# Altium PCB ADC_Comm.PcbDoc
Units mm, origin at the board's own origin, x right, y up, seen from the top; angles counter-clockwise.
Board outline 80 x 48 mm, 4 copper layers (Top Layer 1, Top Layer, Bottom Layer, Bottom Layer 1), stack 0.551 mm thick; 52 components, 24 nets, 189 pads, 0 vias.
Unrouted connection lines stored in the file: 96.
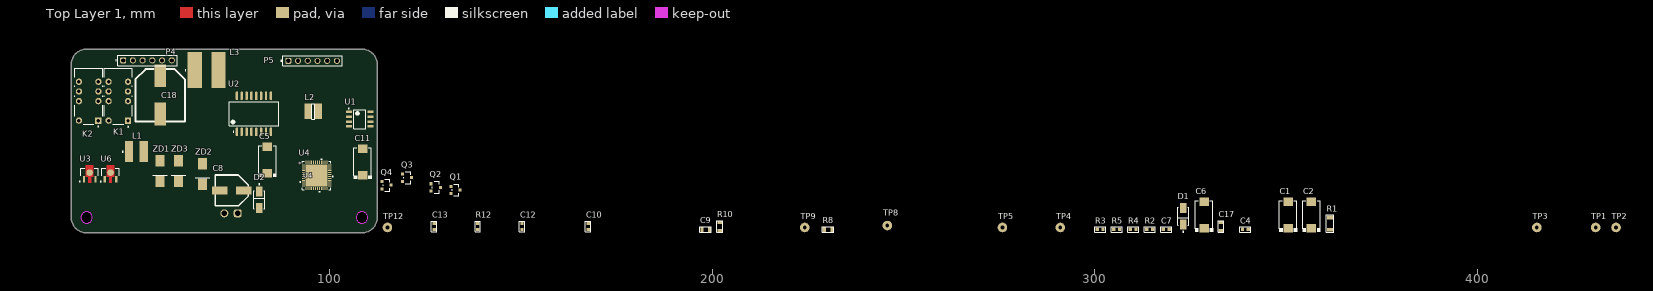
[diagram p0: Top Layer 1 view]
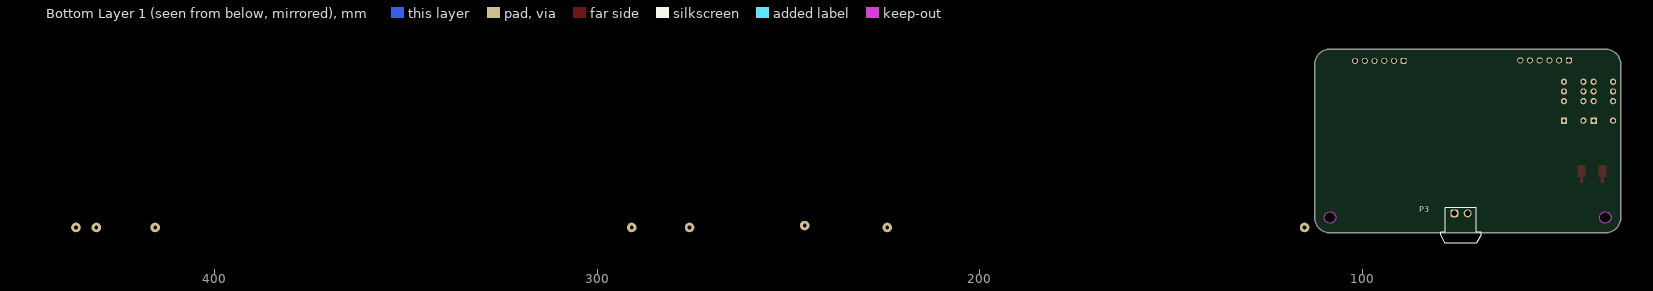
[diagram p1: Bottom Layer 1 view, seen from below]
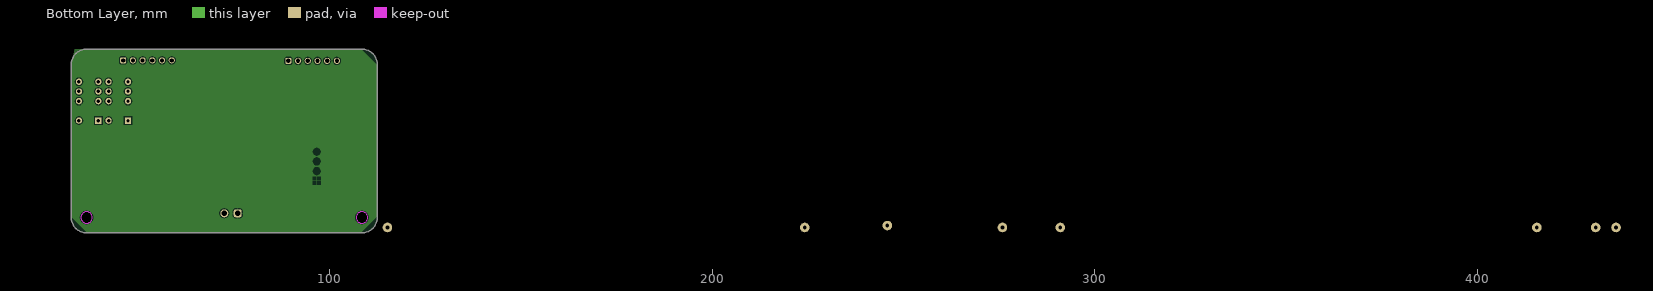
[diagram p2: Bottom Layer]

## Layer stack, top to bottom
Top Solder: solder mask 0.0254, SM-001, Dk 4
Top Layer 1: signal copper 0.009
Dielectric 2: prepreg 0.0711, PP-006, Dk 4.1
Top Layer: signal copper 0.0356
Dielectric 1: dielectric 0.32, FR-4, Dk 4.8
Bottom Layer: signal copper 0.0356
Dielectric 3: prepreg 0.0711, PP-006, Dk 4.1
Bottom Layer 1: signal copper 0.009
Bottom Solder: solder mask 0.0254, SM-001, Dk 4

## Board outline
32.406,33.978 ccw(c36.405,33.978) 36.405,29.978 108.406,29.978 ccw(c108.406,33.978) 112.406,33.978 112.406,73.978 ccw(c108.406,73.978) 108.406,77.978 36.405,77.978 ccw(c36.405,73.978) 32.406,73.978
cut-out: 106.906,33.978 ccw(c108.406,33.978) 108.406,32.478 ccw(c108.406,33.978) 109.906,33.978 ccw(c108.406,33.978) 108.406,35.478 ccw(c108.406,33.978)
cut-out: 34.906,33.978 ccw(c36.405,33.978) 36.405,32.478 ccw(c36.405,33.978) 37.905,33.978 ccw(c36.405,33.978) 36.405,35.478 ccw(c36.405,33.978)

## Design rules (kind name [scope] priority, off if disabled: settings)
Clearance [All] p1: gap=0.154 ignorepadtopadclearanceinfootprint=FALSE
PolygonConnect [All] p1: connectstyle=Relief reliefconductorwidth=0.254 reliefentries=4 polygonreliefangle="90 Angle" airgapwidth=0.254
RoutingVias [All] p1: holewidth=0.711 width=1.27 viastyle="Through Hole" minholewidth=0.711 minwidth=1.27 maxholewidth=0.711 maxwidth=1.27
SolderMaskExpansion [All] p1: expansion=0.102 istentingtop=FALSE
SupplyNets "Schematic Supply Nets_7" [InNet('GND_ISOL')] p1: voltage=0.000
SupplyNets "Schematic Supply Nets_8" [InNet('+12')] p2: voltage=0.000
SupplyNets "Schematic Supply Nets_6" [InNet('+5V')] p3: voltage=0.000
SupplyNets "Schematic Supply Nets_4" [InNet('GND')] p4: voltage=0.000
SupplyNets "Schematic Supply Nets_3" [InNet('VCC')] p5: voltage=0.000
SupplyNets "Schematic Supply Nets_2" [InNet('3v3')] p6: voltage=0.000
Width [All] p1: maxlimit=0.254 minlimit=0.254 preferedwidth=0.254
30 further rules are at their usual default settings.

## Components (designator, comment, footprint, x,y, rotation, side; value= is the part's Value field where it differs from the comment)
C1 "100uF_16V" CAP-TAN-D 350.52,34.671 r90 top
C2 "100uF_16V" CAP-TAN-D 356.616,34.671 r90 top
C4 "470pF" CAP-0603 339.344,30.861 r0 top
C5 "100uF_16V" CAP-TAN-D 83.693,49.022 r90 top
C6 "100uF_16V" CAP-TAN-D 328.549,34.671 r90 top
C7 "0.1uF" CAP-0603 318.643,30.861 r0 top
C8 "330uF 25V" CAP_SMD_Size_E 74.295,41.021 r0 top
C9 "0.47uF" CAP-0805 198.247,30.861 r0 top
C10 "0.1uF" CAP-0603 167.513,31.623 r90 top
C11 "47uF_16V" CAP-TAN-D 108.585,48.514 r90 top
C12 "0.1uF" CAP-0603 150.241,31.623 r90 top
C13 "0.1uF" CAP-0603 127.254,31.623 r90 top
C17 "0.47uF" CAP-0805 332.994,31.623 r90 top
C18 "CAP_POL_SMD" CAP_SMD_SIZE_H 55.626,66.04 r90 top
D1 "ES1G" FP-403AE-MFG 323.088,34.29 r90 top
D2 "SS14" DO-214-AC 81.534,38.608 r90 top
K1 "F1CA005V" V23079-A1001-B301 44.704,65.659 r90 top
K2 "F1CA005V" V23079-A1001-B301 36.957,65.659 r90 top
L1 "470µH" WE-PD2_5848 49.423,51.181 r0 top
L2 "220uH" Coil_4.5x4.5_mm 95.631,61.722 r0 top
L3 "27µH, 1.95A" WE-PD2_1054 67.768,72.517 r0 top
P3 "691305140002" 691305140002 74.168,31.877 r180 bottom
P4 "61300611121" 61300611121 52.324,75.057 r0 top
P5 "61300611121" 61300611121 95.504,74.93 r0 top
Q1 "AO3400A" FP-SOT23-MFG 132.842,41.148 r0 top
Q2 "AO3400A" FP-SOT23-MFG 127.692,41.844 r0 top
Q3 "AO3400A" FP-SOT23-MFG 120.199,44.384 r0 top
Q4 "AO3400A" FP-SOT23-MFG 114.808,42.418 r0 top
R1 "0.33" RES-1206 361.442,32.385 r90 top
R2 "10K" RES-0603 314.325,30.861 r0 top
R3 "10K" RES-0603 301.371,30.861 r0 top
R4 "10K" RES-0603 310.007,30.861 r0 top
R5 "10K" RES-0603 305.689,30.861 r0 top
R8 "6.8K" RES-0805 230.251,30.861 r0 top
R10 "1.2K" RES-0805 201.93,31.623 r90 top
R12 "10K" RES-0603 138.684,31.623 r90 top
TP1 "Test_Point_PCB" Test_Point 430.911,31.369 r0 top
TP2 "Test_Point_PCB" Test_Point 436.245,31.369 r0 top
TP3 "Test_Point_PCB" Test_Point 415.544,31.369 r0 top
TP4 "Test_Point_PCB" Test_Point 290.957,31.369 r0 top
TP5 "Test_Point_PCB" Test_Point 275.844,31.369 r0 top
TP8 "Test_Point_PCB" Pin_Test_Point(Orange) 245.745,31.877 r0 top
TP9 "Test_Point_PCB" Test_Point 224.155,31.369 r0 top
TP12 "Test_Point_PCB" Test_Point 115.062,31.369 r90 top
U1 "MC34063" SOIC-8_M 107.823,59.69 r0 top
U2 "ADM2687E" ADI-RI-16-2_M 80.137,61.088 r90 top
U3 "AMS1117" SOT-89 37.211,45.72 r0 top
U4 "STM32L452CCU6" UFQFPN48-7x7mm_STM 96.52,44.958 r0 top
U6 "AMS1117-3.3" SOT-89 42.672,45.72 r0 top
ZD1 "P6SMB16CA" DO-214AA 55.626,43.815 r90 top
ZD2 "P6SMB16CA" DO-214AA 66.675,43.053 r90 top
ZD3 "P6SMB16CA" DO-214AA 60.452,43.815 r90 top

## Footprints (in the part's own frame and the unit in brackets; to place one, negate y for a bottom-side part, rotate by r counter-clockwise, add the part's x,y. Pads: shape width x height; smd on the part's side, far side on the other; paste and mask are expansions set on the pad)
61300611121 [mm] "Pin Header, pitch 2.54 mm, THT, Vertical, single row, 6p"
  rrect50% 1.6x1.6 hole 1.1: 1(-6.35,0)
  round 1.6 hole 1.1: 2(-3.81,0) 3(-1.27,0) 4(1.27,0) 5(3.81,0) 6(6.35,0)
  silkscreen extent -8.34,-1.35 7.77,1.35, body extent -7.62,-1.27 7.62,1.27, height 8.57
691305140002 [mm] "Horizontal PCB Header with Plastic Latch, pitch 3.5mm, 02p"
  rrect50% 2.1x2.1 hole 1.4: 1(-1.75,3.2)
  round 2.1 hole 1.4: 2(1.75,3.2)
  silkscreen extent -5.25,-4.6 5.25,4.6, body extent -5.25,-4.6 5.25,4.6, height 7.25
ADI-RI-16-2_M [mm] "ADI-RI-16-2_M"
  oval 2.3x0.65 smd: 1(-4.7,4.445) 2(-4.7,3.175) 3(-4.7,1.905) 4(-4.7,0.635) 5(-4.7,-0.635) 6(-4.7,-1.905) 7(-4.7,-3.175) 8(-4.7,-4.445) 9(4.7,-4.445) 10(4.7,-3.175) 11(4.7,-1.905) 12(4.7,-0.635) 13(4.7,0.635) 14(4.7,1.905) 15(4.7,3.175) 16(4.7,4.445)
  silkscreen extent -4.82,-6.45 3.15,6.45, body extent -3.8,-6.45 3.8,6.45, height 2.64
CAP-0603 [mm]
  rect 0.85x0.9 smd: 1(-0.775,0) 2(0.775,0)
  silkscreen extent -1.43,-0.67 1.43,0.67, body extent -0.8,-0.4 0.8,0.4, height 0.8
CAP-0805 [mm]
  rect 0.8x1.25 smd mask+0.015: 1(-1,0) 2(1,0)
  silkscreen extent -1.52,-0.76 1.52,0.76, body extent -1,-0.62 1,0.63, height 0.8
CAP-TAN-D [mm]
  rect 2.2x2.5 smd: 1(-3.45,0) 2(3.45,0)
  silkscreen extent -4.5,-2.4 3.65,2.4, body extent -3.8,-2.3 3.8,2.3, height 4
CAP_SMD_Size_E [mm]
  rect 4x2 smd: 1(3.175,0) 2(-3.048,0)
  silkscreen extent -4.19,-3.94 4.32,4.06, body extent -4.25,-4 4.25,4, height 10.59
CAP_SMD_SIZE_H [mm]
  rect 6x3 smd: 1(5,0) 2(-5,0)
  silkscreen extent -6.98,-6.48 6.73,6.48, body extent -7,-6.44 7,6.44, height 13.62
Coil_4.5x4.5_mm [mm]
  rect 1.8x4 smd: 1(-1.397,0) 2(1.397,0)
  silkscreen extent -0.38,-2.03 0.38,2.03, body extent -2.07,-2.07 2.07,2.07, height 2.8
DO-214-AC [mm]
  rect 2.65x1.75 smd paste+0 mask+0: 1(-2.15,0) 2(2.15,0)
  silkscreen extent -2.37,-1.48 4.17,1.48, body extent -3.57,-1.58 3.57,1.58, height 0.25
DO-214AA [mm]
  rect 3x2.4 smd: 1(-0.381,0) 2(4.953,0)
  silkscreen extent 1.27,-1.91 1.27,1.91, body extent -0.53,-1.85 5.07,2.1, height 2.65
FP-403AE-MFG [mm]
  rect 2.65x1.75 smd paste+0 mask+0: 1(-2.15,0) 2(2.15,0)
  silkscreen extent -4.17,-1.48 2.37,1.48, body extent -3.57,-1.58 3.57,1.58, height 0.25
FP-SOT23-MFG [mm]
  rect 0.8x0.8 smd paste+0 mask+0: 1(-1.2,0.95) 2(-1.2,-0.95) 3(1.2,0)
  silkscreen extent -0.9,-1.55 0.9,1.55, body extent -1.7,-1.78 1.7,1.78, height 0.25
Pin_Test_Point(Orange) [mm]
  round 2.5 hole 0.95: 1(0,0)
  body extent -1.3,-1.78 1.3,1.78, height 6.93
RES-0603 [mm]
  rect 0.85x0.9 smd: 1(-0.775,0) 2(0.775,0)
  silkscreen extent -1.43,-0.67 1.43,0.67, body extent -0.85,-0.45 0.85,0.45, height 0.55
RES-0805 [mm]
  rect 0.8x1.25 smd mask+0.015: 1(-1,0) 2(1,0)
  silkscreen extent -1.52,-0.76 1.52,0.76, body extent -1,-0.62 1,0.63, height 0.6
RES-1206 [mm]
  rect 1x1.6 smd: 1(-1.6,0) 2(1.6,0)
  silkscreen extent -2.29,-1.02 2.29,1.02, body extent -1.6,-0.8 1.6,0.8, height 0.6
SOIC-8_M [mm]
  rrect15% 1.65x0.65 smd: 1(-2.825,1.905) 2(-2.825,0.635) 3(-2.825,-0.635) 4(-2.825,-1.905) 5(2.825,-1.905) 6(2.825,-0.635) 7(2.825,0.635) 8(2.825,1.905)
  silkscreen extent -2.95,-2.5 1.6,2.9, body extent -3,-2.45 3,2.45, height 1.63
SOT-89 [mm]
  rect 0.58x1.73 smd paste+0 mask+0: 1(-1.5,-1.781) 3(1.5,-1.781)
  round 1.74 smd paste+0 mask+0: 2(0,0)
  Top Layer 1 region: -0.38,-2.646 -0.38,-1.146 -0.967,-1.146 -0.967,1.884 0.967,1.884 0.967,-1.146 0.38,-1.146 0.38,-2.646
  silkscreen extent -2.7,-2.47 2.3,1.15, body extent -2.4,-2.75 2.4,1.98, height 0.25
Test_Point [mm]
  round 2.5 hole 0.95: 1(0,0)
UFQFPN48-7x7mm_STM [mm] "UFQFPN48-7x7mm_STM"
  rect 0.808x0.255 smd paste+0 mask+0: 1(-3.452,2.75) 2(-3.452,2.25) 3(-3.452,1.75) 4(-3.452,1.25) 5(-3.452,0.75) 6(-3.452,0.25) 7(-3.452,-0.25) 8(-3.452,-0.75) 9(-3.452,-1.25) 10(-3.452,-1.75) 11(-3.452,-2.25) 12(-3.452,-2.75) 25(3.452,-2.75) 26(3.452,-2.25) 27(3.452,-1.75) 28(3.452,-1.25) 29(3.452,-0.75) 30(3.452,-0.25) 31(3.452,0.25) 32(3.452,0.75) 33(3.452,1.25) 34(3.452,1.75) 35(3.452,2.25) 36(3.452,2.75)
  rect 0.255x0.808 smd paste+0 mask+0: 13(-2.75,-3.452) 14(-2.25,-3.452) 15(-1.75,-3.452) 16(-1.25,-3.452) 17(-0.75,-3.452) 18(-0.25,-3.452) 19(0.25,-3.452) 20(0.75,-3.452) 21(1.25,-3.452) 22(1.75,-3.452) 23(2.25,-3.452) 24(2.75,-3.452) 37(2.75,3.452) 38(2.25,3.452) 39(1.75,3.452) 40(1.25,3.452) 41(0.75,3.452) 42(0.25,3.452) 43(-0.25,3.452) 44(-0.75,3.452) 45(-1.25,3.452) 46(-1.75,3.452) 47(-2.25,3.452) 48(-2.75,3.452)
  rect 5.69x5.69 smd paste-2.845 mask+0: 49(0,0)
  silkscreen extent -4.36,-4.36 4.36,4.36, body extent -3.56,-3.56 3.56,3.56, height 0.61
V23079-A1001-B301 [mm]
  rect 1.65x1.65 hole 0.9 paste-2539.97 mask+0: 1(-6.35,-2.54)
  round 1.65 hole 0.9 paste-2539.97 mask+0: 2(-1.27,-2.54) 3(1.27,-2.54) 4(3.81,-2.54) 5(3.81,2.54) 6(1.27,2.54) 7(-1.27,2.54) 8(-6.35,2.54)
  silkscreen extent -8.02,-3.65 7.3,3.65, body extent -7.4,-3.75 7.4,3.75, height 0.25
WE-PD2_1054 [mm] "SMD Power Inductor, 2-Leads, body 10x9mm"
  rect 3.75x9.5 smd: 1(-3.125,0) 2(3.125,0)
  silkscreen extent -5.62,-0.12 -5.37,0.12, body extent -5.04,-4.5 5.04,4.5, height 5.43
WE-PD2_5848 [mm] "SMD Power Inductor, 2-Leads, body 5.8x5.2mm"
  rect 2.15x5.5 smd: 1(-1.925,0) 2(1.925,0)
  silkscreen extent -3.67,-0.12 -3.42,0.12, body extent -2.9,-2.6 2.89,2.6, height 4.48

## Part data
C1 C2 C5 C6 C8: library part CAP_POL_SMD
C4 C7 C9 C10 C12 C13 C17: library part CAP-NON-POLAR
C11: library part CAP-POLAR
D1: "Ultrafast"
L1: library part 744774033, "WE-PD2 SMT Power Inductor, size 5848, 3.3µH, 4A, 0.06Ω", Case/Size Code=5848, DC Resistance=0.042Ω, DC Resistance Max=0.06Ω, Inductance=3.3µH, Manufacturer="Wurth Elektronik", Operating Temperature Max=125°C, Operating Temperature Min=-40°C, Rated Current=4A, Saturation Current=7.5A, Self Resonant Frequency=43MHz, Category="Unshielded Power Inductors", ComponentLink1Description="Website Link", ComponentLink1URL=https://www.we-online.com/redexpert/article/744774033?ad, ComponentLink2Description="Datasheet Link", ComponentLink2URL=https://www.we-online.com/redexpert/spec/744774033?ad, Height=4.5mm, Length=5.8mm, Manufacturer Part Number=744774033, Match Code=WE-PD2, Mount="Surface Mount", Packaging="Tape and Reel", Width=5.2mm, Simulation ModelName=5848_744774033_3.3u, Simulation ModelText=".subckt 5848_744774033_3.3u 1 2 / Rp 1 2 12000 / Cp 1 2 3.4p / Rs 1 N3 0.042 / L1 N3 2 3.3u / .ends 5848_744774033_3.3u", Simulation PortMap=(1:1),(2:2)
L2: library part Coil
L3: library part 744776127, "WE-PD2 SMT Power Inductor, size 1054, 27µH, 1.95A, 0.11Ω", Case/Size Code=1054, DC Resistance=0.063Ω, DC Resistance Max=0.11Ω, Inductance=27µH, Manufacturer="Wurth Elektronik", Operating Temperature Max=125°C, Operating Temperature Min=-40°C, Rated Current=1.95A, Saturation Current=1.98A, Self Resonant Frequency=15MHz, Category="Unshielded Power Inductors", ComponentLink1Description="Website Link", ComponentLink1URL=https://www.we-online.com/redexpert/article/744776127?ad, ComponentLink2Description="Datasheet Link", ComponentLink2URL=https://www.we-online.com/redexpert/spec/744776127?ad, Height=5.4mm, Length=10mm, Manufacturer Part Number=744776127, Match Code=WE-PD2, Mount="Surface Mount", Packaging="Tape and Reel", Width=9mm, Simulation ModelName=1054_744776127_27u, Simulation ModelText=".subckt 1054_744776127_27u 1 2 / Rp 1 2 22000 / Cp 1 2 4.7p / Rs 1 N3 0.0627 / L1 N3 2 27u / .ends 1054_744776127_27u", Simulation PortMap=(1:1),(2:2)
P3: "WR-TBL Series 3051 Horizontal PCB Header, THT, pitch 3.5mm, 02p", Manufacturer="Wurth Elektronik", Operating Temperature Max=105degC, Operating Temperature Min=-40degC, Rated Current=12A, Working Voltage=300V, Application=Pluggable, Category="Terminal Block", ComponentLink1Description="Website Link", ComponentLink1URL=https://www.we-online.com, ComponentLink2Description="Datasheet Link", ComponentLink2URL=https://www.we-online.com/components/products/datasheet/691305140002, Lead Pitch=3.5mm, Manufacturer Part Number=691305140002, Modularity=No, Mount="Through Hole", Number of Pins=2, Number of Rows=1, Orientation=Horizontal, Packaging=Box, System="Pluggable Connector"
P4 P5: "WR-PHD Pin Header, THT, Vertical, pitch 2.54mm, 1 Row, 6P", Contact Resistance=20mOhm, Manufacturer="Wurth Elektronik", Operating Temperature Max=105°C, Operating Temperature Min=-40°C, Rated Current=3A, Withstanding Voltage=500V, Working Voltage=250V, Category="Board-to-Board Connectors", ComponentLink1Description="Website Link", ComponentLink1URL=https://www.we-online.com/redexpert/article/61300611121?ad, ComponentLink2Description="Datasheet Link", ComponentLink2URL=https://www.we-online.com/redexpert/spec/61300611121?ad, Gender="Pin Header", Manufacturer Part Number=61300611121, Match Code=WR-PHD, Mount="Through Hole", Number of Pins=6, Number of Rows=1, Orientation=Vertical, Packaging=Bag, Pitch=2.54mm
Q1 Q2 Q3 Q4: library part CMP-83955-000006-1, "MOSFET N-CH 30V 5.7A SOT23", Case/Package=SOT-23, Continuous Drain Current (ID)=5.7A, Drain to Source Voltage (Vdss)=30V, Gate to Source Voltage (Vgs)=12V, Input Capacitance=630pF, Max Operating Temperature=150°C, Max Power Dissipation=1.4W, Min Operating Temperature=-55°C, Lead Free="Lead Free", Mount="Surface Mount", Number of Elements=1, Number of Pins=3, Packaging="Tape and Reel", Power Dissipation=1.4W, Radiation Hardening=No, Rds On Max=26.5mR
R1 R2 R3 R4 R5 R8 R10 R12: library part RES-CONST
TP1 TP2 TP3 TP4 TP5 TP8 TP9 TP12: library part TP_PCB?, "Test_Point"
U6: library part AMS1117

## Nets (pads, with @x,y where several pads share a name; then routed paths per layer and width w, separated by ;. In a path a pad name is that pad's centre, name@x,y a point inside that pad or via, vN(x,y) a via of type N, cw(c..) or ccw(c..) an arc to the next point about the centre after c; other vN are vias at no path point)
3v3: C10.2 C11.1 C12.2 P5.6 R3.2 R4.2 TP9.1 U2.2 U2.7 U6.2
+5V: C6.1 P5.1 U3.2
+12: C18.1 K1.3 K2.3 L3.2 P4.5 P4.6
GND: C1.2 C2.2 C4.2 C5.2 C6.2 C7.1 C8.2 C9.2 C10.1 C11.2 C12.1 C13.1 C18.2 D1.2 P3.1 P5.2 Q1.2 Q2.2 R5.1 R10.1 TP8.1 U1.4 U2.1 U2.8 U3.1 U6.1
GND_ISOL: C17.2 R12.1 TP12.1 U2.9 U2.16 ZD2.1 ZD3.1
NetC1_1: C1.1 C5.1 L1.2 L2.1 R8.1
NetC2_1: C2.1 C7.2 C13.2 L2.2 TP2.1 U3.3 U6.3
NetC4_1: C4.1 U1.3
NetC17_1: C17.1 R2.2 U2.10 U2.15
NetD1_1: D1.1 L1.1 TP1.1 U1.2
NetD2_1: D2.1 P3.2
NetP1_1: R2.1 U2.11 U2.14 ZD1.2 ZD2.2
NetP1_3: R12.2 U2.12 U2.13 ZD1.1 ZD3.2
NetP4_1: P4.1 P4.2 Q2.3
NetP4_3: P4.3 P4.4 Q1.3
NetP5_3: P5.3
NetP5_4: P5.4
NetP5_5: P5.5 U4.15
NetR1_2: R1.2 U1.1 U1.7 U1.8
NetR3_1: R3.1 TP4.1 U2.6
NetR4_1: R4.1 TP5.1 U2.3
NetR5_2: R5.2 TP3.1 U2.4 U2.5
NetR8_2: R8.2 R10.2 U1.5
VCC: C8.1 C9.1 D2.2 K1.1 K2.1 L3.1 R1.1 U1.6
pads on no net: K1.2 K1.4 K1.5 K1.6 K1.7 K1.8 K2.2 K2.4 K2.5 K2.6 K2.7 K2.8 Q1.1 Q2.1 Q3.1 Q3.2 Q3.3 Q4.1 Q4.2 Q4.3 U4.1 U4.2 U4.3 U4.4 U4.5 U4.6 U4.7 U4.8 U4.9 U4.10 U4.11 U4.12 U4.13 U4.14 U4.16 U4.17 U4.18 U4.19 U4.20 U4.21 U4.22 U4.23 U4.24 U4.25 U4.26 U4.27 U4.28 U4.29 U4.30 U4.31 U4.32 U4.33 U4.34 U4.35 U4.36 U4.37 U4.38 U4.39 U4.40 U4.41 U4.42 U4.43 U4.44 U4.45 U4.46 U4.47 U4.48 U4.49

## Polygon pours and split planes (outlines as drawn)
GND on Bottom Layer "GND_L03_P000" (solid, pour order 0): 33.274,77.978 108.204,77.978 112.395,73.787 112.395,34.29 108.077,29.972 36.576,29.972 32.385,34.163 32.385,73.533

## Silkscreen, mask and mechanical layers (free items; w line width, h text height)
Mechanical 1:
  circle w0.013: c89.047,74.978 r0.5
  circle w0.013: c36.405,33.978 r1.5
  circle w0.013: c108.406,33.978 r1.5
  circle w0.013: c58.823,74.978 r0.5
  circle w0.013: c56.283,74.978 r0.5
  circle w0.013: c53.743,74.978 r0.5
  circle w0.013: c51.203,74.978 r0.5
  circle w0.013: c48.663,74.978 r0.5
  circle w0.013: c46.123,74.978 r0.5
  circle w0.013: c91.587,74.978 r0.5
  circle w0.013: c94.127,74.978 r0.5
  circle w0.013: c96.667,74.978 r0.5
  circle w0.013: c99.207,74.978 r0.5
  circle w0.013: c101.747,74.978 r0.5
  lines w0.013: 32.406,33.978 ccw(c36.405,33.978) 36.405,29.978 108.406,29.978 ccw(c108.406,33.978) 112.406,33.978 112.406,73.978 ccw(c108.406,73.978) 108.406,77.978 36.405,77.978 ccw(c36.405,73.978) 32.406,73.978 32.406,33.978

## Text inside footprints (layer, text, board x,y; h text height)
U4: Top Overlay "*" at 91.712,47.323 h1.27; Top 3D Body "*" at 93.154,47.323 h1.27